# Altium PCB 6678_double_vpx.PcbDoc (part 2 of 3)
Units mil, origin at the board's own origin, x right, y up, seen from the top; angles counter-clockwise.
Board outline 6299.21 x 3937.01 mil, 6 copper layers (TOP, GND02, S03, S04, GND05, BOTTOM), stack 32.112 mil thick; 42 components, 156 nets, 734 pads, 1033 vias.
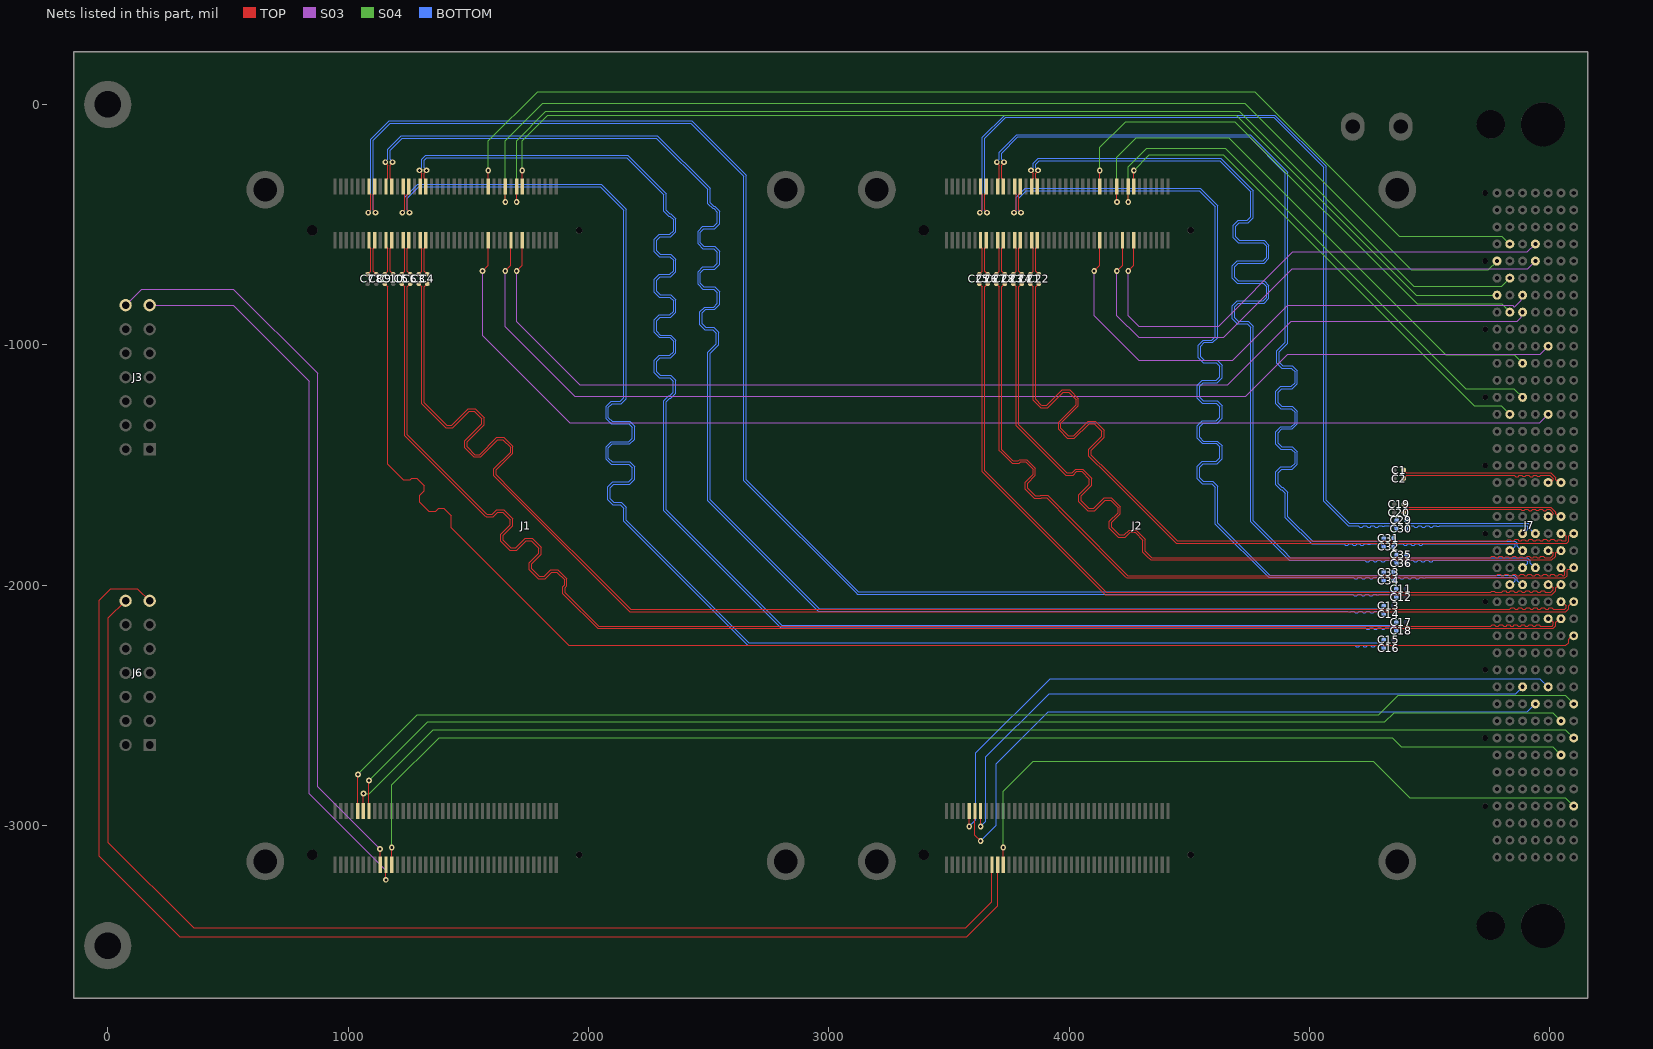
[diagram p6: the nets of this part, all layers, seen from the top]

## Via types
v1: diameter 24, hole 12, TOP to BOTTOM, tented both sides, 833 vias
v2: diameter 24, hole 12, TOP to BOTTOM, 200 vias

## Nets (pads, with @x,y where several pads share a name; then routed paths per layer and width w, separated by ;. In a path a pad name is that pad's centre, name@x,y a point inside that pad or via, vN(x,y) a via of type N, cw(c..) or ccw(c..) an arc to the next point about the centre after c; other vN are vias at no path point) (continued)
CLK1IN_N: C2.1 J7.P1_C10 | length 684.4
  TOP w4: C2.1@5390.69,-1560 C2.1@5392.19,-1558.5 ; C2.1@5390.68,-1557 5404.69,-1543 5850,-1543 5852,-1543 5858,-1549 5868,-1549 5874,-1543 5884,-1543 5888.16,-1547.16 5898.16,-1547.16 5902.32,-1543 5912.32,-1543 5918.32,-1549 5928.32,-1549 5934.32,-1543 5944.32,-1543 5947.98,-1546.66 5957.98,-1546.66 5961.65,-1543 5986,-1543 5999.82,-1543 6014.88,-1558.06 6014.88,-1561.38 6012.54,-1563.72 6011.46,-1563.72 6002.35,-1572.83 J7.P1_C10@5993.31,-1572.83
CLK1IN_P: C1.1 J7.P1_B10 | length 681.4
  TOP w4: C1.1@5390.68,-1521.57 5402.12,-1533 6003.96,-1533 6024.88,-1553.92 6024.88,-1561.38 6027.23,-1563.72 6028.3,-1563.72 6037.42,-1572.83 J7.P1_B10@6046.46,-1572.83
CLK2_25M_SEL: J2.B1_31 J7.P1_E3 | length 2361.6
  TOP w4.5: v2(4198.76,-406.1) J2.B1_31@4198.76,-340.69
  S04 w4.5: v2(4198.76,-406.1) 4198.76,-220.24 4280,-139 4665,-139 5567,-1041 5851.24,-1041 J7.P1_E3@5887.01,-1076.77
CLK2_ELF: J2.A1_32 J7.P0_D5 | length 2234.4
  TOP w4.5: v2(4198.66,-692.91) 4222.19,-669.38 J2.A1_32@4222.19,-564.91
  S03 w4.5: v2(4198.66,-692.91) 4198.66,-879 4289,-969.34 4642.61,-969.34 4927.59,-684.35 5907.38,-684.35 J7.P0_D5@5940.16,-651.57
CLK2_PDN: J2.A1_34 J7.P0_D4 | length 2177.1
  TOP w4.5: v2(4246,-693) 4269.53,-669.47 J2.A1_34@4269.53,-565
  S03 w4.5: v2(4246,-693) 4246,-879 4289,-922 4623,-922 4931.34,-613.66 5907.21,-613.66 J7.P0_D4@5940.16,-580.71
CLK2_SI_MODE0: J2.B1_34 J7.P1_F6 | length 2104
  TOP w4.5: v2(4269.42,-275.08) 4269.42,-340.49 J2.B1_34@4269.53,-340.59
  S04 w4.5: v2(4269.42,-275.08) 4334.51,-210 4642,-210 5686,-1254 5798.49,-1254 J7.P1_F6@5833.86,-1289.37
CLK2_SI_MODE1: J2.B1_33 J7.P1_E5 | length 2314.1
  TOP w4.5: v2(4246.01,-406.1) J2.B1_33@4246.01,-340.69
  S04 w4.5: v2(4246.01,-406.1) 4246.01,-259.99 4324,-182 4650,-182 5650,-1182 5850.51,-1182 J7.P1_E5@5887.01,-1218.5
CLK2IN_N: C20.1 J7.P1_C12 | length 680.7
  TOP w4: C20.1@5392.69,-1700 5407.69,-1685 5878,-1685 5880,-1685 5883.87,-1688.86 5893.87,-1688.86 5897.73,-1685 5907.73,-1685 5913.73,-1691 5923.73,-1691 5929.73,-1685 5939.73,-1685 5943.86,-1689.13 5953.86,-1689.13 5958,-1685 5968,-1685 5974,-1691 5984,-1691 5990,-1685 6000.09,-1685 6003.54,-1688.46 6014.88,-1699.79 6014.88,-1703.11 6012.54,-1705.45 6011.46,-1705.45 6002.35,-1714.57 J7.P1_C12@5993.31,-1714.57
CLK2IN_P: C19.1 J7.P1_B12 | length 684.5
  TOP w4: C19.1@5392.69,-1664.57 5403.12,-1675 6004.23,-1675 6024.88,-1695.65 6024.88,-1703.11 6027.23,-1705.45 6028.3,-1705.45 6037.42,-1714.57 J7.P1_B12@6046.46,-1714.57 ; C19.1@5392.68,-1656.57 C19.1@5396.69,-1660.57
CLK_25M_SEL: J1.B1_31 J7.P0_G5 | length 4813.5
  TOP w4.5: v2(1654.24,-406.1) J1.B1_31@1654.24,-340.69
  S04 w4.5: v2(1654.24,-406.1) 1654.24,-150.76 1809.5,4.5 4731.5,4.5 5424,-688 5744.28,-688 J7.P0_G5@5780.71,-651.57
CLK_ELF: J1.A1_32 J7.P1_C2 | length 4913.8
  TOP w4.5: v2(1654.13,-692.91) 1677.66,-669.38 J1.A1_32@1677.66,-564.91
  S03 w4.5: v2(1654.13,-692.91) 1654.13,-924.08 1943.39,-1213.34 4734.66,-1213.34 4909.15,-1038.86 5960.36,-1038.86 J7.P1_C2@5993.31,-1005.9
CLK_PDN: J1.A1_34 J7.P0_E8 | length 4776.5
  TOP w4.5: v2(1701.47,-693) 1725,-669.47 J1.A1_34@1725,-565
  S03 w4.5: v2(1701.47,-693) 1701.47,-904.47 1963,-1166 4660,-1166 4924.4,-901.6 5863.85,-901.6 5880.71,-884.74 5880.71,-870.47 J7.P0_E8@5887.01,-864.17
CLK_SI_MODE0: J1.B1_34 J7.P0_G7 | length 4599.8
  TOP w4.5: v2(1724.9,-275.08) 1724.9,-340.49 J1.B1_34@1725,-340.59
  S04 w4.5: v2(1724.9,-275.08) 1724.9,-150.1 1830,-45 4696,-45 5444.31,-793.31 J7.P0_G7@5780.71,-793.31
CLK_SI_MODE1: J1.B1_33 J7.P0_F6 | length 4818.9
  TOP w4.5: v2(1701.48,-406.1) J1.B1_33@1701.48,-340.69
  S04 w4.5: v2(1701.48,-406.1) 1701.48,-150.39 1701.38,-150.29 1823.17,-28.5 4707.5,-28.5 5434.39,-755.39 5800.91,-755.39 J7.P0_F6@5833.86,-722.44
DSP0_PORZ: J1.B2_5 J7.P2_A7 | length 5361.6
  TOP w4.5: J1.B2_5@1039.96,-2939.02 1041,-2937.98 v2(1041,-2788)
  S04 w4.5: v2(1041,-2788) 1041,-2786.68 1287.68,-2540 5289,-2540 5370,-2459 6064.51,-2459 J7.P2_A7@6099.61,-2494.09
DSP0_RSTn: J1.B2_7 J7.P2_B8 | length 5217.4
  TOP w4.5: v2(1087,-2813) 1087,-2938.81 J1.B2_7@1087.2,-2939.02
  S04 w4.5: v2(1087,-2813) 1331,-2569 5314,-2569 5353.13,-2529.87 6011.36,-2529.87 J7.P2_B8@6046.46,-2564.96
DSP0_SRIO0_RX_N: C12.2 J1.B1_8 | length 6282.8
  TOP w4: J1.B1_8@1110.83,-340.59 1110.83,-367.17 1104.02,-373.98 1104.02,-437.86 1114.02,-447.86 v2(1114.02,-450)
  BOTTOM w4: v2@1111.02,-450 1111.02,-447.66 1104.02,-440.66 1104.02,-149.13 1175.14,-78 2425.86,-78 2646,-298.14 2646,-1565 2651.86,-1570.86 3113.43,-2032.43 3119.28,-2038.28 5179,-2038.28 5181,-2038.28 5187,-2044.28 5197,-2044.28 5203,-2038.28 5213,-2038.28 5219,-2044.28 5229,-2044.28 5235,-2038.28 5245,-2038.28 5251,-2044.28 5261,-2044.28 5267,-2038.28 5277,-2038.28 5279,-2040.28 5289,-2040.28 5291,-2038.28 5330,-2038.28 5348.6,-2038.28 C12.2@5361.31,-2051
DSP0_SRIO0_RX_P: C11.2 J1.B1_7 | length 6282.8
  TOP w4: v2(1084.02,-450) 1084.02,-447.86 1094.02,-437.86 1094.02,-373.98 1087.2,-367.17 J1.B1_7@1087.2,-340.59
  BOTTOM w4: v2@1087.02,-450 1087.02,-447.66 1094.02,-440.66 1094.02,-144.98 1171,-68 2430,-68 2656,-294 2656,-1560.86 3123.43,-2028.28 5348.6,-2028.28 C11.2@5361.31,-2015.57
DSP0_SRIO0_TX_N: C4.2 J1.A1_17 | length 149.3
  TOP w4: J1.A1_17@1323.43,-565 1323.43,-591.57 1316.92,-598.08 1316.92,-693.6 C4.2@1329.64,-706.32
DSP0_SRIO0_TX_P: C3.2 J1.A1_16 | length 149.5
  TOP w4: C3.2@1294.2,-706.32 1306.92,-693.6 1306.92,-598.69 1299.8,-591.57 J1.A1_16@1299.8,-565
DSP0_SRIO1_RX_N: C14.2 J1.B1_11 | length 6278.3
  TOP w4: J1.B1_11@1181.69,-340.59 1181.69,-314.02 1174.88,-307.2 1174.88,-252.14 1184.88,-242.14 v2(1184.88,-240)
  S03 w4: v2@1181.75,-240 v2(1184.88,-240)
  BOTTOM w4: v2@1181.47,-234.66 1174.47,-227.66 1174.47,-191 1225.47,-140 2282.86,-140 2496,-353.14 2496,-403 2496,-412.07 2516.66,-432.73 2521.2,-432.73 2536,-447.53 2536,-491.93 2521.2,-506.73 2476.66,-506.73 2456,-527.39 2456,-580.07 2476.66,-600.73 2521.2,-600.73 2536,-615.53 2536,-659.93 2521.2,-674.73 2476.66,-674.73 2456,-695.39 2456,-748.07 2476.66,-768.73 2521.2,-768.73 2536,-783.53 2536,-827.93 2521.2,-842.73 2484.48,-842.73 2463.82,-863.39 2463.82,-916.07 2484.48,-936.73 2516.66,-936.73 2531.46,-951.53 2531.46,-995.93 2516.66,-1010.73 2496,-1031.39 2496,-1212 2496,-1648 2956.27,-2108.27 5146,-2108.27 5160.18,-2108.27 5162.59,-2110.68 5172.59,-2110.68 5175,-2108.27 5185,-2108.27 5191,-2114.27 5201,-2114.27 5207,-2108.27 5217,-2108.27 5223,-2114.27 5233,-2114.27 5239,-2108.27 5249,-2108.27 5255,-2114.27 5265,-2114.27 5271,-2108.27 5273,-2108.27 5296.6,-2108.27 C14.2@5309.32,-2120.98
DSP0_SRIO1_RX_P: C13.2 J1.B1_10 | length 6284.8
  TOP w4: v2(1154.88,-240) 1154.88,-242.14 1164.88,-252.14 1164.88,-307.2 1158.07,-314.02 J1.B1_10@1158.07,-340.59
  S03 w4: v2(1154.88,-240) v2@1164.88,-240
  BOTTOM w4: v2@1157.47,-234.66 1164.47,-227.66 1164.47,-186.86 1221.33,-130 2287,-130 2506,-349 2506,-403 2506,-407.93 2520.8,-422.73 2525.34,-422.73 2546,-443.39 2546,-496.07 2525.34,-516.73 2480.8,-516.73 2466,-531.53 2466,-575.93 2480.8,-590.73 2525.34,-590.73 2546,-611.39 2546,-664.07 2525.34,-684.73 2480.8,-684.73 2466,-699.53 2466,-743.93 2480.8,-758.73 2525.34,-758.73 2546,-779.39 2546,-832.07 2525.34,-852.73 2488.62,-852.73 2473.82,-867.53 2473.82,-911.93 2488.62,-926.73 2520.8,-926.73 2541.46,-947.39 2541.46,-1000.07 2520.8,-1020.73 2506,-1035.53 2506,-1212 2506,-1643.86 2960.41,-2098.27 5296.6,-2098.27 C13.2@5309.32,-2085.55
DSP0_SRIO1_TX_N: C6.2 J1.A1_14 | length 149.3
  TOP w4: J1.A1_14@1252.56,-565 1252.56,-591.57 1246.06,-598.08 1246.06,-693.6 C6.2@1258.77,-706.32
DSP0_SRIO1_TX_P: C5.2 J1.A1_13 | length 149.5
  TOP w4: C5.2@1223.34,-706.32 1236.06,-693.6 1236.06,-598.69 1228.94,-591.57 J1.A1_13@1228.94,-565
DSP0_SRIO2_RX_N: C16.2 J1.B1_14 | length 6274.6
  TOP w4: J1.B1_14@1252.56,-340.59 1252.56,-367.17 1245.75,-373.98 1245.75,-437.86 1255.75,-447.86 v2(1255.75,-450)
  BOTTOM w4: v2@1252.47,-450 1252.47,-447.66 1245.47,-440.66 1245.47,-390.53 1294,-342 2049.86,-342 2148,-440.14 2148,-1130.93 2148,-1219.86 2133.2,-1234.66 2094.02,-1234.66 2073.36,-1255.31 2073.36,-1308 2094.02,-1328.66 2166.95,-1328.66 2181.75,-1343.46 2181.75,-1387.86 2166.95,-1402.66 2094.02,-1402.66 2073.36,-1423.31 2073.36,-1476 2094.02,-1496.66 2166.95,-1496.66 2181.75,-1511.46 2181.75,-1555.86 2166.95,-1570.66 2101.52,-1570.66 2080.86,-1591.31 2080.86,-1644 2101.52,-1664.66 2133.2,-1664.66 2148,-1679.46 2148,-1729.03 2148,-1735 2662.28,-2249.28 5125,-2249.28 5189,-2249.28 5195,-2255.28 5205,-2255.28 5211,-2249.28 5221,-2249.28 5227,-2255.28 5237,-2255.28 5243,-2249.28 5253,-2249.28 5259,-2255.28 5269,-2255.28 5275,-2249.28 5277,-2249.28 5296.6,-2249.28 C16.2@5309.31,-2262
DSP0_SRIO2_RX_P: C15.2 J1.B1_13 | length 6276.3
  TOP w4: v2(1225.75,-450) 1225.75,-447.86 1235.75,-437.86 1235.75,-373.98 1228.94,-367.17 J1.B1_13@1228.94,-340.59
  BOTTOM w4: v2@1228.47,-450 1228.47,-447.66 1235.47,-440.66 1235.47,-386.39 1289.86,-332 2054,-332 2158,-436 2158,-1130.93 2158,-1224 2137.34,-1244.66 2098.16,-1244.66 2083.36,-1259.46 2083.36,-1303.86 2098.16,-1318.66 2171.09,-1318.66 2191.75,-1339.31 2191.75,-1392 2171.09,-1412.66 2098.16,-1412.66 2083.36,-1427.46 2083.36,-1471.86 2098.16,-1486.66 2171.09,-1486.66 2191.75,-1507.31 2191.75,-1560 2171.09,-1580.66 2105.66,-1580.66 2090.86,-1595.46 2090.86,-1639.86 2105.66,-1654.66 2137.34,-1654.66 2158,-1675.31 2158,-1729.03 2158,-1730.86 2666.43,-2239.28 5296.6,-2239.28 C15.2@5309.31,-2226.57
DSP0_SRIO2_TX_N: C7.2 J1.A1_7 | length 149.5
  TOP w4: C7.2@1081.61,-706.32 1094.32,-693.6 1094.32,-598.69 1087.2,-591.57 J1.A1_7@1087.2,-565
DSP0_SRIO2_TX_P: C8.2 J1.A1_8 | length 149.3
  TOP w4: J1.A1_8@1110.83,-565 1110.83,-591.57 1104.32,-598.08 1104.32,-693.6 C8.2@1117.04,-706.32
DSP0_SRIO3_RX_N: C18.2 J1.B1_17 | length 6277.7
  TOP w4: J1.B1_17@1323.43,-340.59 1323.43,-314.02 1316.61,-307.2 1316.61,-286.14 1326.61,-276.14 v2(1326.61,-274)
  BOTTOM w4: v2@1323.47,-273 1323.47,-270.66 1316.47,-263.66 1316.47,-231 1326.47,-221 2158.86,-221 2314,-376.14 2314,-435.61 2314,-444.68 2334.66,-465.34 2339.2,-465.34 2354,-480.14 2354,-524.54 2339.2,-539.34 2294.66,-539.34 2274,-560 2274,-612.68 2294.66,-633.34 2339.2,-633.34 2354,-648.14 2354,-692.54 2339.2,-707.34 2294.66,-707.34 2274,-728 2274,-780.68 2294.66,-801.34 2339.2,-801.34 2354,-816.14 2354,-860.54 2339.2,-875.34 2294.66,-875.34 2274,-896 2274,-948.68 2294.66,-969.34 2339.2,-969.34 2354,-984.14 2354,-1028.54 2339.2,-1043.34 2294.66,-1043.34 2274,-1064 2274,-1116.68 2294.66,-1137.34 2337.82,-1137.34 2352.62,-1152.14 2352.62,-1196.54 2337.82,-1211.34 2334.66,-1211.34 2314,-1232 2314,-1248 2314,-1691 2319.86,-1696.86 2794.43,-2171.43 2800.28,-2177.28 5210,-2177.28 5232,-2177.28 5238,-2183.28 5248,-2183.28 5254,-2177.28 5264,-2177.28 5270,-2183.28 5280,-2183.28 5286,-2177.28 5296,-2177.28 5302,-2183.28 5312,-2183.28 5318,-2177.28 5320,-2177.28 5348.6,-2177.28 C18.2@5361.31,-2190
DSP0_SRIO3_RX_P: C17.2 J1.B1_16 | length 6279.4
  TOP w4: v2(1296.61,-274) 1296.61,-276.14 1306.61,-286.14 1306.61,-307.2 1299.8,-314.02 J1.B1_16@1299.8,-340.59
  BOTTOM w4: v2@1299.47,-273 1299.47,-270.66 1306.47,-263.66 1306.47,-226.86 1322.33,-211 2163,-211 2324,-372 2324,-435.61 2324,-440.54 2338.8,-455.34 2343.34,-455.34 2364,-476 2364,-528.68 2343.34,-549.34 2298.8,-549.34 2284,-564.14 2284,-608.54 2298.8,-623.34 2343.34,-623.34 2364,-644 2364,-696.68 2343.34,-717.34 2298.8,-717.34 2284,-732.14 2284,-776.54 2298.8,-791.34 2343.34,-791.34 2364,-812 2364,-864.68 2343.34,-885.34 2298.8,-885.34 2284,-900.14 2284,-944.54 2298.8,-959.34 2343.34,-959.34 2364,-980 2364,-1032.68 2343.34,-1053.34 2298.8,-1053.34 2284,-1068.14 2284,-1112.54 2298.8,-1127.34 2341.96,-1127.34 2362.62,-1148 2362.62,-1200.68 2341.96,-1221.34 2338.8,-1221.34 2324,-1236.14 2324,-1248 2324,-1686.86 2804.43,-2167.28 5348.6,-2167.28 C17.2@5361.31,-2154.57
DSP0_SRIO3_TX_N: C9.2 J1.A1_10 | length 149.5
  TOP w4: C9.2@1152.47,-706.32 1165.19,-693.6 1165.19,-598.69 1158.07,-591.57 J1.A1_10@1158.07,-565
DSP0_SRIO3_TX_P: C10.2 J1.A1_11 | length 149.3
  TOP w4: J1.A1_11@1181.69,-565 1181.69,-591.57 1175.19,-598.08 1175.19,-693.6 C10.2@1187.91,-706.32
DSP0_SYSYCLKOUT: J1.A2_11 J7.P2_B10 | length 5308.7
  TOP w4.5: J1.A2_11@1181.35,-3163.76 J1.A2_11@1181.69,-3163.43 v2(1181.69,-3091.75)
  S04 w4.5: v2@1182.03,-3091.41 1182.03,-2830.97 1379,-2634 5344,-2634 5381.6,-2671.6 6011.36,-2671.6 J7.P2_B10@6046.46,-2706.69
DSP0_UARTRXD: J1.A1_28 J7.P1_C6 | length 5006.3
  TOP w4.5: v2(1559.65,-692.91) 1583.17,-669.38 J1.A1_28@1583.17,-564.91
  S03 w4.5: v2(1559.65,-692.91) 1559.65,-963.22 1921.43,-1325 5957.68,-1325 J7.P1_C6@5993.31,-1289.37
DSP0_UARTTXD: J1.B1_28 J7.P0_F4 | length 4787.7
  TOP w4.5: v2(1583.16,-275.08) 1583.16,-340.49 J1.B1_28@1583.27,-340.59
  S04 w4.5: v2(1583.16,-275.08) 1583.16,-151.83 1788.99,54 4772,54 5374,-548 5801.15,-548 J7.P0_F4@5833.86,-580.71
DSP0_WRSTn: J1.B2_6 J7.P2_A9 | length 5232.7
  TOP w4.5: J1.B2_6@1063.58,-2939.02 1063.92,-2938.68 v2(1063.92,-2867)
  S04 w4.5: v2(1063.92,-2867) 1088,-2867 1354.27,-2600.73 6064.51,-2600.73 J7.P2_A9@6099.61,-2635.83
DSP1_PORZ: J2.B2_5 J7.P2_C6 | length 2905.5
  TOP w4.5: v2(3584.76,-3004) J2.B2_5@3584.76,-2939.28
  BOTTOM w4.5: v2(3584.76,-3004) 3612,-2976.76 3612,-2698 3921,-2389 5487,-2389 5959.08,-2389 J7.P2_C6@5993.31,-2423.23
DSP1_RSTn: J2.B2_7 J7.P2_E6 | length 2717.2
  TOP w4.5: J2.B2_7@3631.73,-2939.02 3632,-2939.28 v2(3632,-3004)
  BOTTOM w4.5: v2(3632,-3004) 3654,-2982 3654,-2715 3918,-2451 5768.95,-2451 5769.13,-2451.18 5845.44,-2451.18 5845.61,-2451 5859.24,-2451 J7.P2_E6@5887.01,-2423.23
DSP1_SRIO0_RX_N: C30.2 J2.B1_8 | length 3715.8
  TOP w4: J2.B1_8@3655.35,-340.59 3655.35,-367.17 3648.54,-373.98 3648.54,-437.86 3658.54,-447.86 v2(3658.54,-450)
  BOTTOM w4: v2@3655.54,-450 3655.54,-447.66 3648.54,-440.66 3648.54,-141.46 3736,-54 4852,-54 5059,-261 5059,-1650 5155.43,-1746.43 5161.28,-1752.28 5202,-1752.28 5204,-1752.28 5210,-1758.28 5220,-1758.28 5226,-1752.28 5236,-1752.28 5242,-1758.28 5252,-1758.28 5258,-1752.28 5268,-1752.28 5274,-1758.28 5284,-1758.28 5290,-1752.28 5300,-1752.28 5302,-1754.28 5312,-1754.28 5314,-1752.28 5338,-1752.28 5348.6,-1752.28 C30.2@5361.31,-1765
DSP1_SRIO0_RX_P: C29.2 J2.B1_7 | length 3715.8
  TOP w4: v2(3628.54,-450) 3628.54,-447.86 3638.54,-437.86 3638.54,-373.98 3631.73,-367.17 J2.B1_7@3631.73,-340.59
  BOTTOM w4: v2@3631.54,-450 3631.54,-447.66 3638.54,-440.66 3638.54,-137.31 3731.86,-44 4856.14,-44 5069,-256.86 5069,-1645.86 5165.43,-1742.28 5202,-1742.28 5348.6,-1742.28 C29.2@5361.31,-1729.57
DSP1_SRIO0_TX_N: C22.2 J2.A1_17 | length 149.3
  TOP w4: J2.A1_17@3867.95,-565 3867.95,-591.57 3861.45,-598.08 3861.45,-693.6 C22.2@3874.17,-706.32
DSP1_SRIO0_TX_P: C21.2 J2.A1_16 | length 149.5
  TOP w4: C21.2@3838.73,-706.32 3851.45,-693.6 3851.45,-598.69 3844.33,-591.57 J2.A1_16@3844.33,-565
DSP1_SRIO1_RX_N: C32.2 J2.B1_11 | length 3711.9
  TOP w4: J2.B1_11@3726.22,-340.59 3726.22,-314.02 3719.41,-307.2 3719.41,-252.14 3729.41,-242.14 v2(3729.41,-240)
  BOTTOM w4: v2@3726,-237 3726,-234.66 3719,-227.66 3719,-202.14 3786.14,-135 4749,-135 4900,-286 4900,-915.96 4900,-989.3 4885.2,-1004.1 4884.8,-1004.1 4864.14,-1024.76 4864.14,-1077.44 4884.8,-1098.1 4925.2,-1098.1 4940,-1112.9 4940,-1157.3 4925.2,-1172.1 4880.66,-1172.1 4860,-1192.76 4860,-1245.44 4880.66,-1266.1 4925.2,-1266.1 4940,-1280.9 4940,-1325.3 4925.2,-1340.1 4880.66,-1340.1 4860,-1360.76 4860,-1413.44 4880.66,-1434.1 4925.2,-1434.1 4940,-1448.9 4940,-1493.3 4925.2,-1508.1 4880.66,-1508.1 4860,-1528.76 4860,-1581.44 4880.66,-1602.1 4885.2,-1602.1 4900,-1616.9 4900,-1621.83 4900,-1719.14 4957.93,-1777.07 4965,-1784.14 5008.86,-1828 5142,-1828 5144,-1828 5150,-1834 5160,-1834 5166,-1828 5176,-1828 5182,-1834 5192,-1834 5198,-1828 5208,-1828 5214,-1834 5224,-1834 5230,-1828 5240,-1828 5242.41,-1830.41 5252.41,-1830.41 5254.82,-1828 5273,-1828 5296.6,-1828 C32.2@5309.32,-1840.72
DSP1_SRIO1_RX_P: C31.2 J2.B1_10 | length 3711.6
  TOP w4: v2(3699.41,-240) 3699.41,-242.14 3709.41,-252.14 3709.41,-307.2 3702.6,-314.02 J2.B1_10@3702.6,-340.59
  BOTTOM w4: v2@3702,-237 3702,-234.66 3709,-227.66 3709,-198 3782,-125 4753.14,-125 4910,-281.86 4910,-915.96 4910,-993.44 4889.34,-1014.1 4888.94,-1014.1 4874.14,-1028.9 4874.14,-1073.3 4888.94,-1088.1 4929.34,-1088.1 4950,-1108.76 4950,-1161.44 4929.34,-1182.1 4884.8,-1182.1 4870,-1196.9 4870,-1241.3 4884.8,-1256.1 4929.34,-1256.1 4950,-1276.76 4950,-1329.44 4929.34,-1350.1 4884.8,-1350.1 4870,-1364.9 4870,-1409.3 4884.8,-1424.1 4929.34,-1424.1 4950,-1444.76 4950,-1497.44 4929.34,-1518.1 4884.8,-1518.1 4870,-1532.9 4870,-1577.3 4884.8,-1592.1 4889.34,-1592.1 4910,-1612.76 4910,-1621.83 4910,-1715 5013,-1818 5296.6,-1818 C31.2@5309.32,-1805.28
DSP1_SRIO1_TX_N: C24.2 J2.A1_14 | length 149.3
  TOP w4: J2.A1_14@3797.09,-565 3797.09,-591.57 3790.58,-598.08 3790.58,-693.6 C24.2@3803.3,-706.32
DSP1_SRIO1_TX_P: C23.2 J2.A1_13 | length 149.5
  TOP w4: C23.2@3767.87,-706.32 3780.58,-693.6 3780.58,-598.69 3773.46,-591.57 J2.A1_13@3773.46,-565
DSP1_SRIO2_RX_N: C34.2 J2.B1_14 | length 3709.1
  TOP w4: J2.B1_14@3797.09,-340.59 3797.09,-367.17 3790.28,-373.98 3790.28,-437.86 3800.28,-447.86 v2(3800.28,-450)
  BOTTOM w4: v2@3797,-450 3797,-447.66 3790,-440.66 3790,-391 3822,-359 4541,-359 4608,-426 4608,-913 4608,-965.47 4593.2,-980.27 4558.18,-980.27 4537.52,-1000.93 4537.52,-1053.61 4558.18,-1074.27 4611.95,-1074.27 4626.75,-1089.07 4626.75,-1133.47 4611.95,-1148.27 4553.5,-1148.27 4532.84,-1168.93 4532.84,-1221.61 4553.5,-1242.27 4611.95,-1242.27 4626.75,-1257.07 4626.75,-1301.47 4611.95,-1316.27 4553.5,-1316.27 4532.84,-1336.93 4532.84,-1389.61 4553.5,-1410.27 4611.95,-1410.27 4626.75,-1425.07 4626.75,-1469.47 4611.95,-1484.27 4553.5,-1484.27 4532.84,-1504.93 4532.84,-1557.61 4553.5,-1578.27 4593.2,-1578.27 4608,-1593.07 4608,-1598 4608,-1746.14 4829.86,-1968 5144,-1968 5182,-1968 5188,-1974 5198,-1974 5204,-1968 5214,-1968 5220,-1974 5230,-1974 5236,-1968 5246,-1968 5252,-1974 5262,-1974 5268,-1968 5270,-1968 5296.6,-1968 C34.2@5309.32,-1980.72
DSP1_SRIO2_RX_P: C33.2 J2.B1_13 | length 3710.7
  TOP w4: v2(3770.28,-450) 3770.28,-447.86 3780.28,-437.86 3780.28,-373.98 3773.46,-367.17 J2.B1_13@3773.46,-340.59
  BOTTOM w4: v2@3773,-450 3773,-447.66 3780,-440.66 3780,-386.86 3817.86,-349 4545.14,-349 4618,-421.86 4618,-913 4618,-969.61 4597.34,-990.27 4562.32,-990.27 4547.52,-1005.07 4547.52,-1049.47 4562.32,-1064.27 4616.09,-1064.27 4636.75,-1084.93 4636.75,-1137.61 4616.09,-1158.27 4557.64,-1158.27 4542.84,-1173.07 4542.84,-1217.47 4557.64,-1232.27 4616.09,-1232.27 4636.75,-1252.93 4636.75,-1305.61 4616.09,-1326.27 4557.64,-1326.27 4542.84,-1341.07 4542.84,-1385.47 4557.64,-1400.27 4616.09,-1400.27 4636.75,-1420.93 4636.75,-1473.61 4616.09,-1494.27 4557.64,-1494.27 4542.84,-1509.07 4542.84,-1553.47 4557.64,-1568.27 4597.34,-1568.27 4618,-1588.93 4618,-1598 4618,-1742 4834,-1958 5296.6,-1958 C33.2@5309.32,-1945.28
DSP1_SRIO2_TX_N: C25.2 J2.A1_7 | length 149.5
  TOP w4: C25.2@3626.13,-706.32 3638.85,-693.6 3638.85,-598.69 3631.73,-591.57 J2.A1_7@3631.73,-565
DSP1_SRIO2_TX_P: C26.2 J2.A1_8 | length 149.3
  TOP w4: J2.A1_8@3655.35,-565 3655.35,-591.57 3648.85,-598.08 3648.85,-693.6 C26.2@3661.57,-706.32
DSP1_SRIO3_RX_N: C36.2 J2.B1_17 | length 3710.6
  TOP w4: J2.B1_17@3867.95,-340.59 3867.95,-314.02 3861.14,-307.2 3861.14,-286.14 3871.14,-276.14 v2(3871.14,-274)
  BOTTOM w4: v2@3868,-273 3868,-270.66 3861,-263.66 3861,-249.37 3876.37,-234 4627,-234 4756,-363 4756,-404 4756,-466.87 4741.2,-481.67 4703.55,-481.67 4682.89,-502.32 4682.89,-555.01 4703.55,-575.67 4806.82,-575.67 4821.62,-590.47 4821.62,-634.87 4806.82,-649.67 4699.8,-649.67 4679.15,-670.32 4679.15,-723.01 4699.8,-743.67 4806.82,-743.67 4821.62,-758.47 4821.62,-802.87 4806.82,-817.67 4699.8,-817.67 4679.15,-838.32 4679.15,-891.01 4699.8,-911.67 4741.2,-911.67 4756,-926.47 4756,-931.4 4756,-1735.14 4882.93,-1862.07 4916.86,-1896 5198,-1896 5231,-1896 5237,-1902 5247,-1902 5253,-1896 5263,-1896 5269,-1902 5279,-1902 5285,-1896 5295,-1896 5301,-1902 5311,-1902 5317,-1896 5319,-1896 5348.6,-1896 C36.2@5361.31,-1908.72
DSP1_SRIO3_RX_P: C35.2 J2.B1_16 | length 3712.3
  TOP w4: v2(3841.14,-274) 3841.14,-276.14 3851.14,-286.14 3851.14,-307.2 3844.33,-314.02 J2.B1_16@3844.33,-340.59
  BOTTOM w4: v2@3844,-273 3844,-270.66 3851,-263.66 3851,-245.23 3872.23,-224 4631.14,-224 4766,-358.86 4766,-404 4766,-471.01 4745.34,-491.67 4707.69,-491.67 4692.89,-506.47 4692.89,-550.87 4707.69,-565.67 4810.96,-565.67 4831.62,-586.32 4831.62,-639.01 4810.96,-659.67 4703.95,-659.67 4689.15,-674.47 4689.15,-718.87 4703.95,-733.67 4810.96,-733.67 4831.62,-754.32 4831.62,-807.01 4810.96,-827.67 4703.95,-827.67 4689.15,-842.47 4689.15,-886.87 4703.95,-901.67 4745.34,-901.67 4766,-922.32 4766,-931.4 4766,-1731 4882.93,-1847.93 4890,-1855 4921,-1886 5348.6,-1886 C35.2@5361.31,-1873.28
DSP1_SRIO3_TX_N: C27.2 J2.A1_10 | length 149.5
  TOP w4: C27.2@3697,-706.32 3709.72,-693.6 3709.72,-598.69 3702.6,-591.57 J2.A1_10@3702.6,-565
DSP1_SRIO3_TX_P: C28.2 J2.A1_11 | length 149.3
  TOP w4: J2.A1_11@3726.22,-565 3726.22,-591.57 3719.72,-598.08 3719.72,-693.6 C28.2@3732.43,-706.32
DSP1_SYSYCLKOUT: J2.A2_11 J7.P2_A13 | length 2809.3
  TOP w4.5: J2.A2_11@3726.22,-3163.43 v2(3726.22,-3091.75)
  S04 w4.5: v2(3726.22,-3091.75) 3726.22,-2856.78 3851,-2732 5265,-2732 5417.2,-2884.2 6064.51,-2884.2 J7.P2_A13@6099.61,-2919.29
DSP1_UARTRXD: J2.A1_28 J7.P0_E7 | length 2308.1
  TOP w4.5: v2(4104.17,-692.91) 4127.7,-669.38 J2.A1_28@4127.7,-564.91
  S03 w4.5: v2(4104.17,-692.91) 4104.17,-879 4289,-1063.83 4681.75,-1063.83 4910.07,-835.5 5180.69,-835.5 5180.94,-835.75 5844.97,-835.75 5850.04,-840.82 5853.76,-840.82 5880.71,-813.87 5880.71,-799.6 J7.P0_E7@5887.01,-793.31
DSP1_UARTTXD: J2.B1_28 J7.P0_F8 | length 2241.5
  TOP w4.5: v2(4127.69,-275.08) 4127.69,-340.49 J2.B1_28@4127.8,-340.59
  S04 w4.5: v2(4127.69,-275.08) 4127.69,-178.31 4235,-71 4689,-71 5448,-830 5799.69,-830 J7.P0_F8@5833.86,-864.17
DSP1_WRSTn: J2.B2_6 J7.P2_D7 | length 2829.1
  TOP w4.5: J2.B2_6@3608.11,-2939.02 3608.11,-3040.11 v2(3632,-3064)
  BOTTOM w4.5: v2(3632,-3064) 3696,-3000 3696,-2744 3912.96,-2527.04 5907.21,-2527.04 J7.P2_D7@5940.16,-2494.09
EMU0: J1.A2_10 J3.13 | length 3064.6
  TOP w4.5: v2(1157,-3226) 1157,-3164.5 J1.A2_10@1158.07,-3163.43
  S03 w4.5: J3.13@174.4,-835.04 522.04,-835.04 838,-1151 838,-2867 1157,-3186 v2(1157,-3226)
EMU1: J1.A2_9 J3.14 | length 3124.5
  TOP w4.5: v2(1133,-3098) 1133,-3161.98 J1.A2_9@1134.45,-3163.43
  S03 w4.5: J3.14@74.4,-835.04 141.44,-768 522,-768 873,-1119 873,-2838 v2(1133,-3098)
EMU20: J2.A2_10 J6.13 | length 5417.8
  TOP w4.5: J6.13@174.4,-2064.96 123.44,-2014 13,-2014 -36,-2063 -36,-3127 300,-3463 3574,-3463 3702.6,-3334.4 J2.A2_10@3702.6,-3163.43
EMU21: J2.A2_9 J6.14 | length 5058
  TOP w4.5: J6.14@74.4,-2064.96 3,-2136.36 3,-3071 358,-3426 3571,-3426 3678.98,-3318.02 J2.A2_9@3678.98,-3163.43
F4_BANK109_RX0_N: C22.1 J7.P1_B13 | length 3428.8
  TOP w4: C22.1@3874.17,-745.69 3861.45,-758.4 3861.45,-1227.31 3883.07,-1248.93 3886.56,-1252.41 3907.49,-1252.41 3972.51,-1187.39 4001.73,-1187.39 4038.98,-1224.64 4038.98,-1253.86 3966,-1326.84 3966,-1347.77 3997.39,-1379.17 4018.32,-1379.17 4079.64,-1317.85 4108.85,-1317.85 4146.11,-1355.11 4146.11,-1384.32 4092.75,-1437.68 4092.75,-1458.61 4166.07,-1531.93 4449.14,-1815 5820,-1815 5822,-1815 5825.87,-1811.13 5835.87,-1811.13 5839.73,-1815 5849.73,-1815 5855.73,-1809 5865.73,-1809 5871.73,-1815 5881.73,-1815 5885.6,-1811.13 5895.6,-1811.13 5899.47,-1815 5909.47,-1815 5915.47,-1809 5925.47,-1809 5931.47,-1815 5941.47,-1815 5946.01,-1810.46 5956.01,-1810.46 5960.56,-1815 5970.56,-1815 5975.6,-1809.95 5985.6,-1809.95 5990.65,-1815 6000.65,-1815 6006.65,-1809 6016.65,-1809 6022.65,-1815 6032.65,-1815 6035.83,-1811.83 6045.83,-1811.83 6049,-1815 6051,-1815 6065.69,-1815 6068.03,-1812.66 6068.03,-1795.48 6064.38,-1791.82 6052.85,-1791.82 J7.P1_B13@6046.46,-1785.43
F4_BANK109_RX0_P: C21.1 J7.P1_A13 | length 3429.9
  TOP w4: C21.1@3838.73,-745.69 3851.45,-758.4 3851.45,-970.45 ; 3851.45,-970.6 3851.45,-1231.45 3876,-1256 3882.41,-1262.41 3911.63,-1262.41 3976.65,-1197.39 3997.58,-1197.39 4028.98,-1228.78 4028.98,-1249.72 3956,-1322.7 3956,-1351.91 3993.25,-1389.17 4022.46,-1389.17 4083.78,-1327.85 4104.71,-1327.85 4136.11,-1359.25 4136.11,-1380.18 4082.75,-1433.53 4082.75,-1462.75 4159,-1539 4445,-1825 6069.83,-1825 6078.03,-1816.8 6078.03,-1795.48 6081.68,-1791.82 6093.22,-1791.82 J7.P1_A13@6099.61,-1785.43
F4_BANK109_RX1_N: C24.1 J7.P1_C14 | length 3428.6
  TOP w4: C24.1@3803.3,-745.69 3790.58,-758.4 3790.58,-1332.58 3987.75,-1529.75 3991.24,-1533.24 4012.17,-1533.24 4028.41,-1517.01 4057.62,-1517.01 4094.87,-1554.26 4094.87,-1583.47 4051.17,-1627.18 4051.17,-1648.11 4082.56,-1679.51 4103.49,-1679.51 4147.2,-1635.8 4176.41,-1635.8 4213.67,-1673.05 4213.67,-1702.27 4178.09,-1737.84 4178.09,-1758.77 4209.49,-1790.17 4230.42,-1790.17 4249.76,-1770.83 4278.97,-1770.83 4316.23,-1808.08 4316.23,-1837.3 4316.23,-1858.23 4331.11,-1873.11 4343,-1885 5751,-1885 5753,-1885 5758.88,-1879.12 5768.88,-1879.12 5774.77,-1885 5784.77,-1885 5789.22,-1880.55 5799.22,-1880.55 5803.67,-1885 5813.67,-1885 5817.47,-1881.19 5827.47,-1881.19 5831.28,-1885 5841.28,-1885 5847.28,-1879 5857.28,-1879 5863.28,-1885 5873.28,-1885 5876.29,-1881.99 5886.29,-1881.99 5889.3,-1885 5899.3,-1885 5905.3,-1879 5915.3,-1879 5921.3,-1885 5931.3,-1885 5934.3,-1882 5944.3,-1882 5947.31,-1885 5957.31,-1885 5963.31,-1879 5973.31,-1879 5979.31,-1885 5987,-1885 6004.88,-1885 6014.88,-1875 6014.88,-1865.03 6012.54,-1862.69 5999.7,-1862.69 J7.P1_C14@5993.31,-1856.3
F4_BANK109_RX1_P: C23.1 J7.P1_B14 | length 3430.1
  TOP w4: C23.1@3767.87,-745.69 3780.58,-758.4 3780.58,-1336.72 3980.68,-1536.83 3987.1,-1543.24 4016.31,-1543.24 4032.55,-1527.01 4053.48,-1527.01 4084.87,-1558.4 4084.87,-1579.33 4041.17,-1623.04 4041.17,-1652.25 4078.42,-1689.51 4107.63,-1689.51 4151.34,-1645.8 4172.27,-1645.8 4203.67,-1677.2 4203.67,-1698.13 4168.09,-1733.7 4168.09,-1762.91 4192.83,-1787.65 4205.35,-1800.17 4234.56,-1800.17 4253.9,-1780.83 4274.83,-1780.83 4306.23,-1812.22 4306.23,-1833.15 4306.23,-1862.37 4324.04,-1880.18 4338.86,-1895 6009.02,-1895 6024.88,-1879.14 6024.88,-1865.03 6027.23,-1862.69 6040.07,-1862.69 J7.P1_B14@6046.46,-1856.3
F4_BANK109_RX2_N: C27.1 J7.P1_A15 | length 3439.8
  TOP w4: C27.1@3697,-745.69 3709.72,-758.4 3709.72,-1439.86 3715.57,-1445.72 3756.43,-1486.57 3762.84,-1492.99 3792.06,-1492.99 3797.81,-1487.24 3818.74,-1487.24 3850.13,-1518.63 3850.13,-1539.56 3818.18,-1571.52 3818.18,-1600.73 3855.43,-1637.99 3884.64,-1637.99 3885.78,-1636.85 3906.71,-1636.85 4001.62,-1731.76 ; 4001.62,-1731.76 4234,-1964.14 4239.86,-1970 6063.14,-1970 6072.16,-1960.98 6072.16,-1936.85 6074.5,-1934.51 6080.73,-1934.51 6081.68,-1933.56 6093.22,-1933.56 J7.P1_A15@6099.61,-1927.16
F4_BANK109_RX2_P: C28.1 J7.P1_B15 | length 3435.7
  TOP w4: C28.1@3732.43,-745.69 3719.72,-758.4 3719.72,-1435.72 3763.5,-1479.5 3766.99,-1482.99 3787.92,-1482.99 3793.66,-1477.24 3822.88,-1477.24 3860.13,-1514.49 3860.13,-1543.7 3828.18,-1575.66 3828.18,-1596.59 3859.57,-1627.99 3880.5,-1627.99 3881.64,-1626.85 3910.85,-1626.85 4008.69,-1724.69 4244,-1960 5775,-1960 5777,-1960 5783,-1954 5793,-1954 5799,-1960 5809,-1960 5815,-1954 5825,-1954 5831,-1960 5841,-1960 5847,-1954 5857,-1954 5863,-1960 5873,-1960 5879,-1954 5889,-1954 5895,-1960 5905,-1960 5911,-1954 5921,-1954 5927,-1960 5937,-1960 5943,-1954 5953,-1954 5959,-1960 5969,-1960 5975,-1954 5985,-1954 5991,-1960 6001,-1960 6007,-1954 6017,-1954 6023,-1960 6033,-1960 6038.44,-1954.56 6048.44,-1954.56 6053.88,-1960 6055.88,-1960 6059,-1960 6062.16,-1956.84 6062.16,-1943.08 6052.85,-1933.77 6052.85,-1933.56 J7.P1_B15@6046.46,-1927.16
F4_BANK109_RX3_N: C25.1 J7.P1_B16 | length 3432.5
  TOP w4: C25.1@3626.13,-745.69 3638.85,-758.4 3638.85,-1527.85 3644.71,-1533.71 4145.14,-2034.14 4151,-2040 6009.02,-2040 6024.88,-2024.14 6024.88,-2010.57 6037.42,-1998.03 J7.P1_B16@6046.46,-1998.03
F4_BANK109_RX3_P: C26.1 J7.P1_C16 | length 3432.5
  TOP w4: C26.1@3661.57,-745.69 3648.85,-758.4 3648.85,-1523.71 4155.14,-2030 5753,-2030 5755,-2030 5759,-2026 5769,-2026 5773,-2030 5800,-2030 5806,-2024 5816,-2024 5822,-2030 5832,-2030 5838,-2024 5848,-2024 5854,-2030 5864,-2030 5870,-2024 5880,-2024 5886,-2030 5896,-2030 5902,-2024 5912,-2024 5918,-2030 5928,-2030 5934,-2024 5944,-2024 5950,-2030 5960,-2030 5966,-2024 5976,-2024 5982,-2030 5984,-2030 6004.88,-2030 6014.88,-2020 6014.88,-2010.57 6002.35,-1998.03 J7.P1_C16@5993.31,-1998.03
F4_BANK109_TX0_N: C30.1 J7.P1_E13 | length 574.6
  BOTTOM w4: C30.1@5400.69,-1764.4 5412.09,-1753 5430,-1753 5432,-1753 5438,-1759 5448,-1759 5454,-1753 5464,-1753 5470,-1759 5480,-1759 5486,-1753 5496,-1753 5502,-1759 5512,-1759 5518,-1753 5528,-1753 5530.15,-1755.15 5540.15,-1755.15 5542.29,-1753 5570,-1753 5785,-1753 5883,-1753 5906.24,-1753 5908.58,-1755.34 5908.58,-1766.39 5896.05,-1778.92 5896.05,-1785.43 J7.P1_E13@5887.01,-1785.43
F4_BANK109_TX0_P: C29.1 J7.P1_D13 | length 575.6
  BOTTOM w4: C29.1@5400.69,-1728.97 5414.72,-1743 5910.38,-1743 5918.58,-1751.2 5918.58,-1766.39 5931.12,-1778.92 5931.12,-1785.43 J7.P1_D13@5940.16,-1785.43
F4_BANK109_TX1_N: C32.1 J7.P1_F14 | length 568.1
  BOTTOM w4: C32.1@5348.69,-1840.72 5361.4,-1828 5385.98,-1828 5387.98,-1828 5393.98,-1834 5403.98,-1834 5409.98,-1828 5419.98,-1828 5425.98,-1834 5435.98,-1834 5441.98,-1828 5451.98,-1828 5457.98,-1834 5467.98,-1834 5473.98,-1828 5524,-1828 5714,-1828 5835,-1828 5853.09,-1828 5855.43,-1830.34 5855.43,-1837.25 5842.9,-1849.79 5842.9,-1856.3 J7.P1_F14@5833.86,-1856.3
F4_BANK109_TX1_P: C31.1 J7.P1_E14 | length 569.7
  BOTTOM w4: C31.1@5348.69,-1805.28 5361.4,-1818 5385.98,-1818 5857.23,-1818 5865.43,-1826.2 5865.43,-1837.25 5877.97,-1849.79 5877.97,-1856.3 J7.P1_E14@5887.01,-1856.3
F4_BANK109_TX2_N: C36.1 J7.P1_E15 | length 573.2
  BOTTOM w4: C36.1@5400.69,-1908.72 5403.75,-1905.66 5403.75,-1899.54 5407.28,-1896 5428,-1896 5430,-1896 5436,-1902 5446,-1902 5452,-1896 5462,-1896 5468,-1902 5478,-1902 5484,-1896 5494,-1896 5500,-1902 5510,-1902 5516,-1896 5537,-1896 5746,-1896 5885,-1896 5902,-1896 5908.58,-1902.58 5908.58,-1908.31 5896.05,-1920.85 5896.05,-1927.16 J7.P1_E15@5887.01,-1927.16
F4_BANK109_TX2_P: C35.1 J7.P1_D15 | length 574.9
  BOTTOM w4: C35.1@5400.69,-1873.28 5403.75,-1876.34 5403.75,-1882.46 5407.28,-1886 5906.14,-1886 5918.58,-1898.44 5918.58,-1908.31 5931.12,-1920.85 5931.12,-1927.16 J7.P1_D15@5940.16,-1927.16
F4_BANK109_TX3_N: C34.1 J7.P1_F16 | length 568.3
  BOTTOM w4: C34.1@5348.69,-1980.72 5361.4,-1968 5372.48,-1968 5374.48,-1968 5380.48,-1974 5390.48,-1974 5396.48,-1968 5406.48,-1968 5412.48,-1974 5422.48,-1974 5428.48,-1968 5438.48,-1968 5444.48,-1974 5454.48,-1974 5460.48,-1968 5470.48,-1968 5472.48,-1970 5482.48,-1970 5484.48,-1968 5508,-1968 5707,-1968 5834,-1968 5847.66,-1968 5855.43,-1975.78 5855.43,-1982.31 5842.9,-1994.85 5842.9,-1998.03 J7.P1_F16@5833.86,-1998.03
F4_BANK109_TX3_P: C33.1 J7.P1_E16 | length 568.3
  BOTTOM w4: C33.1@5348.69,-1945.28 5361.4,-1958 5368.34,-1958 5851.8,-1958 5865.43,-1971.63 5865.43,-1982.31 5877.97,-1994.85 5877.97,-1998.03 J7.P1_E16@5887.01,-1998.03
F4_BANK110_RX0_N: C4.1 J7.P2_B1 | length 6134.1
  TOP w4: C4.1@1329.64,-745.69 1316.92,-758.4 1316.92,-1241.78 1396.07,-1320.93 1410.5,-1335.35 1431.43,-1335.35 1500.58,-1266.2 1529.8,-1266.2 1567.05,-1303.45 1567.05,-1332.66 1495.55,-1404.17 1495.55,-1425.1 1526.95,-1456.49 1547.88,-1456.49 1619.38,-1384.99 1648.59,-1384.99 1685.85,-1422.24 1685.85,-1451.46 1616.69,-1520.62 1616.69,-1541.55 1679.57,-1604.43 2175.14,-2100 5832,-2100 5834,-2100 5840,-2094 5850,-2094 5856,-2100 5866,-2100 5871.91,-2094.09 5881.91,-2094.09 5887.82,-2100 5897.82,-2100 5903.82,-2094 5913.82,-2094 5919.82,-2100 5929.82,-2100 5935.23,-2094.6 5945.23,-2094.6 5950.63,-2100 5960.63,-2100 5966.63,-2094 5976.63,-2094 5982.63,-2100 5992.63,-2100 5998.58,-2094.05 6008.58,-2094.05 6014.53,-2100 6037,-2100 6063.03,-2100 6068.03,-2095 6068.03,-2085 6051.93,-2068.9 J7.P2_B1@6046.46,-2068.9
F4_BANK110_RX0_P: C3.1 J7.P2_A1 | length 6138
  TOP w4: C3.1@1294.2,-745.69 1306.92,-758.4 1306.92,-1245.92 1389,-1328 1406.35,-1345.35 1435.57,-1345.35 1504.73,-1276.2 1525.66,-1276.2 1557.05,-1307.59 1557.05,-1328.52 1485.55,-1400.03 1485.55,-1429.24 1522.8,-1466.49 1552.02,-1466.49 1623.52,-1394.99 1644.45,-1394.99 1675.85,-1426.39 1675.85,-1447.32 1606.69,-1516.47 1606.69,-1545.69 1672.5,-1611.5 2171,-2110 6067.17,-2110 6078.03,-2099.14 6078.03,-2085 6094.14,-2068.9 J7.P2_A1@6099.61,-2068.9
F4_BANK110_RX1_N: C6.1 J7.P2_C2 | length 6138.1
  TOP w4: C6.1@1258.77,-745.69 1246.06,-758.4 1246.06,-1373.91 1574.57,-1702.43 1578.06,-1705.91 1598.99,-1705.91 1618.84,-1686.06 1648.05,-1686.06 1660.57,-1698.58 1685.31,-1723.32 1685.31,-1752.53 1645.5,-1792.34 1645.5,-1813.27 1676.89,-1844.67 1697.82,-1844.67 1737.63,-1804.86 1766.85,-1804.86 1804.1,-1842.11 1804.1,-1871.32 1764.29,-1911.14 1764.29,-1932.07 1795.69,-1963.46 1816.62,-1963.46 1844.06,-1936.02 1873.27,-1936.02 1910.53,-1973.27 1910.53,-2002.49 1903.04,-2009.97 1903.04,-2030.9 1911.07,-2038.93 2042.14,-2170 5752,-2170 5754,-2170 5760,-2164 5770,-2164 5776,-2170 5786,-2170 5792,-2164 5802,-2164 5808,-2170 5818,-2170 5822.57,-2165.43 5832.57,-2165.43 5837.14,-2170 5847.14,-2170 5853.14,-2164 5863.14,-2164 5869.14,-2170 5879.14,-2170 5883.67,-2165.46 5893.67,-2165.46 5898.21,-2170 5908.21,-2170 5914.21,-2164 5924.21,-2164 5930.21,-2170 5940.21,-2170 5945.26,-2164.95 5955.26,-2164.95 5960.3,-2170 5984,-2170 6009.88,-2170 6014.88,-2165 6014.88,-2155 5999.65,-2139.76 J7.P2_C2@5993.31,-2139.76
F4_BANK110_RX1_P: C5.1 J7.P2_B2 | length 6139.7
  TOP w4: C5.1@1223.34,-745.69 1236.06,-758.4 1236.06,-1378.06 1567.5,-1709.5 1573.91,-1715.91 1603.13,-1715.91 1622.98,-1696.06 1643.91,-1696.06 1675.31,-1727.46 1675.31,-1748.39 1635.5,-1788.2 1635.5,-1817.41 1672.75,-1854.67 1701.96,-1854.67 1741.77,-1814.86 1762.71,-1814.86 1794.1,-1846.25 1794.1,-1867.18 1754.29,-1906.99 1754.29,-1936.21 1791.54,-1973.46 1820.76,-1973.46 1848.2,-1946.02 1869.13,-1946.02 1900.53,-1977.41 1900.53,-1998.34 1893.04,-2005.83 1893.04,-2035.04 1904,-2046 2038,-2180 6014.02,-2180 6024.88,-2169.14 6024.88,-2155 6040.12,-2139.76 J7.P2_B2@6046.46,-2139.76
F4_BANK110_RX2_N: C9.1 J7.P2_A3 | length 6139.8
  TOP w4: C9.1@1152.47,-745.69 1165.19,-758.4 1165.19,-1497.19 1171.05,-1503.05 1223,-1555 1229.41,-1561.41 1258.63,-1561.41 1264.97,-1555.07 1285.9,-1555.07 1317.3,-1586.47 1317.3,-1607.4 1298.42,-1626.28 1298.42,-1655.49 1335.67,-1692.75 1364.89,-1692.75 1377.42,-1680.21 1398.35,-1680.21 1429.75,-1711.6 1429.75,-1732.53 1429.75,-1761.75 1462.42,-1794.42 1912.14,-2244.14 1918,-2250 6067.17,-2250 6078.03,-2239.14 6078.03,-2225 6092.4,-2210.63 J7.P2_A3@6099.61,-2210.63